# Altium PCB PCB1.PcbDoc (part 2 of 2)
Units mil, origin at the board's own origin, x right, y up, seen from the top; angles counter-clockwise.
Board outline 6000 x 4000 mil, 2 copper layers (Top Layer, Bottom Layer); 224 components, 172 nets, 745 pads, 57 vias.
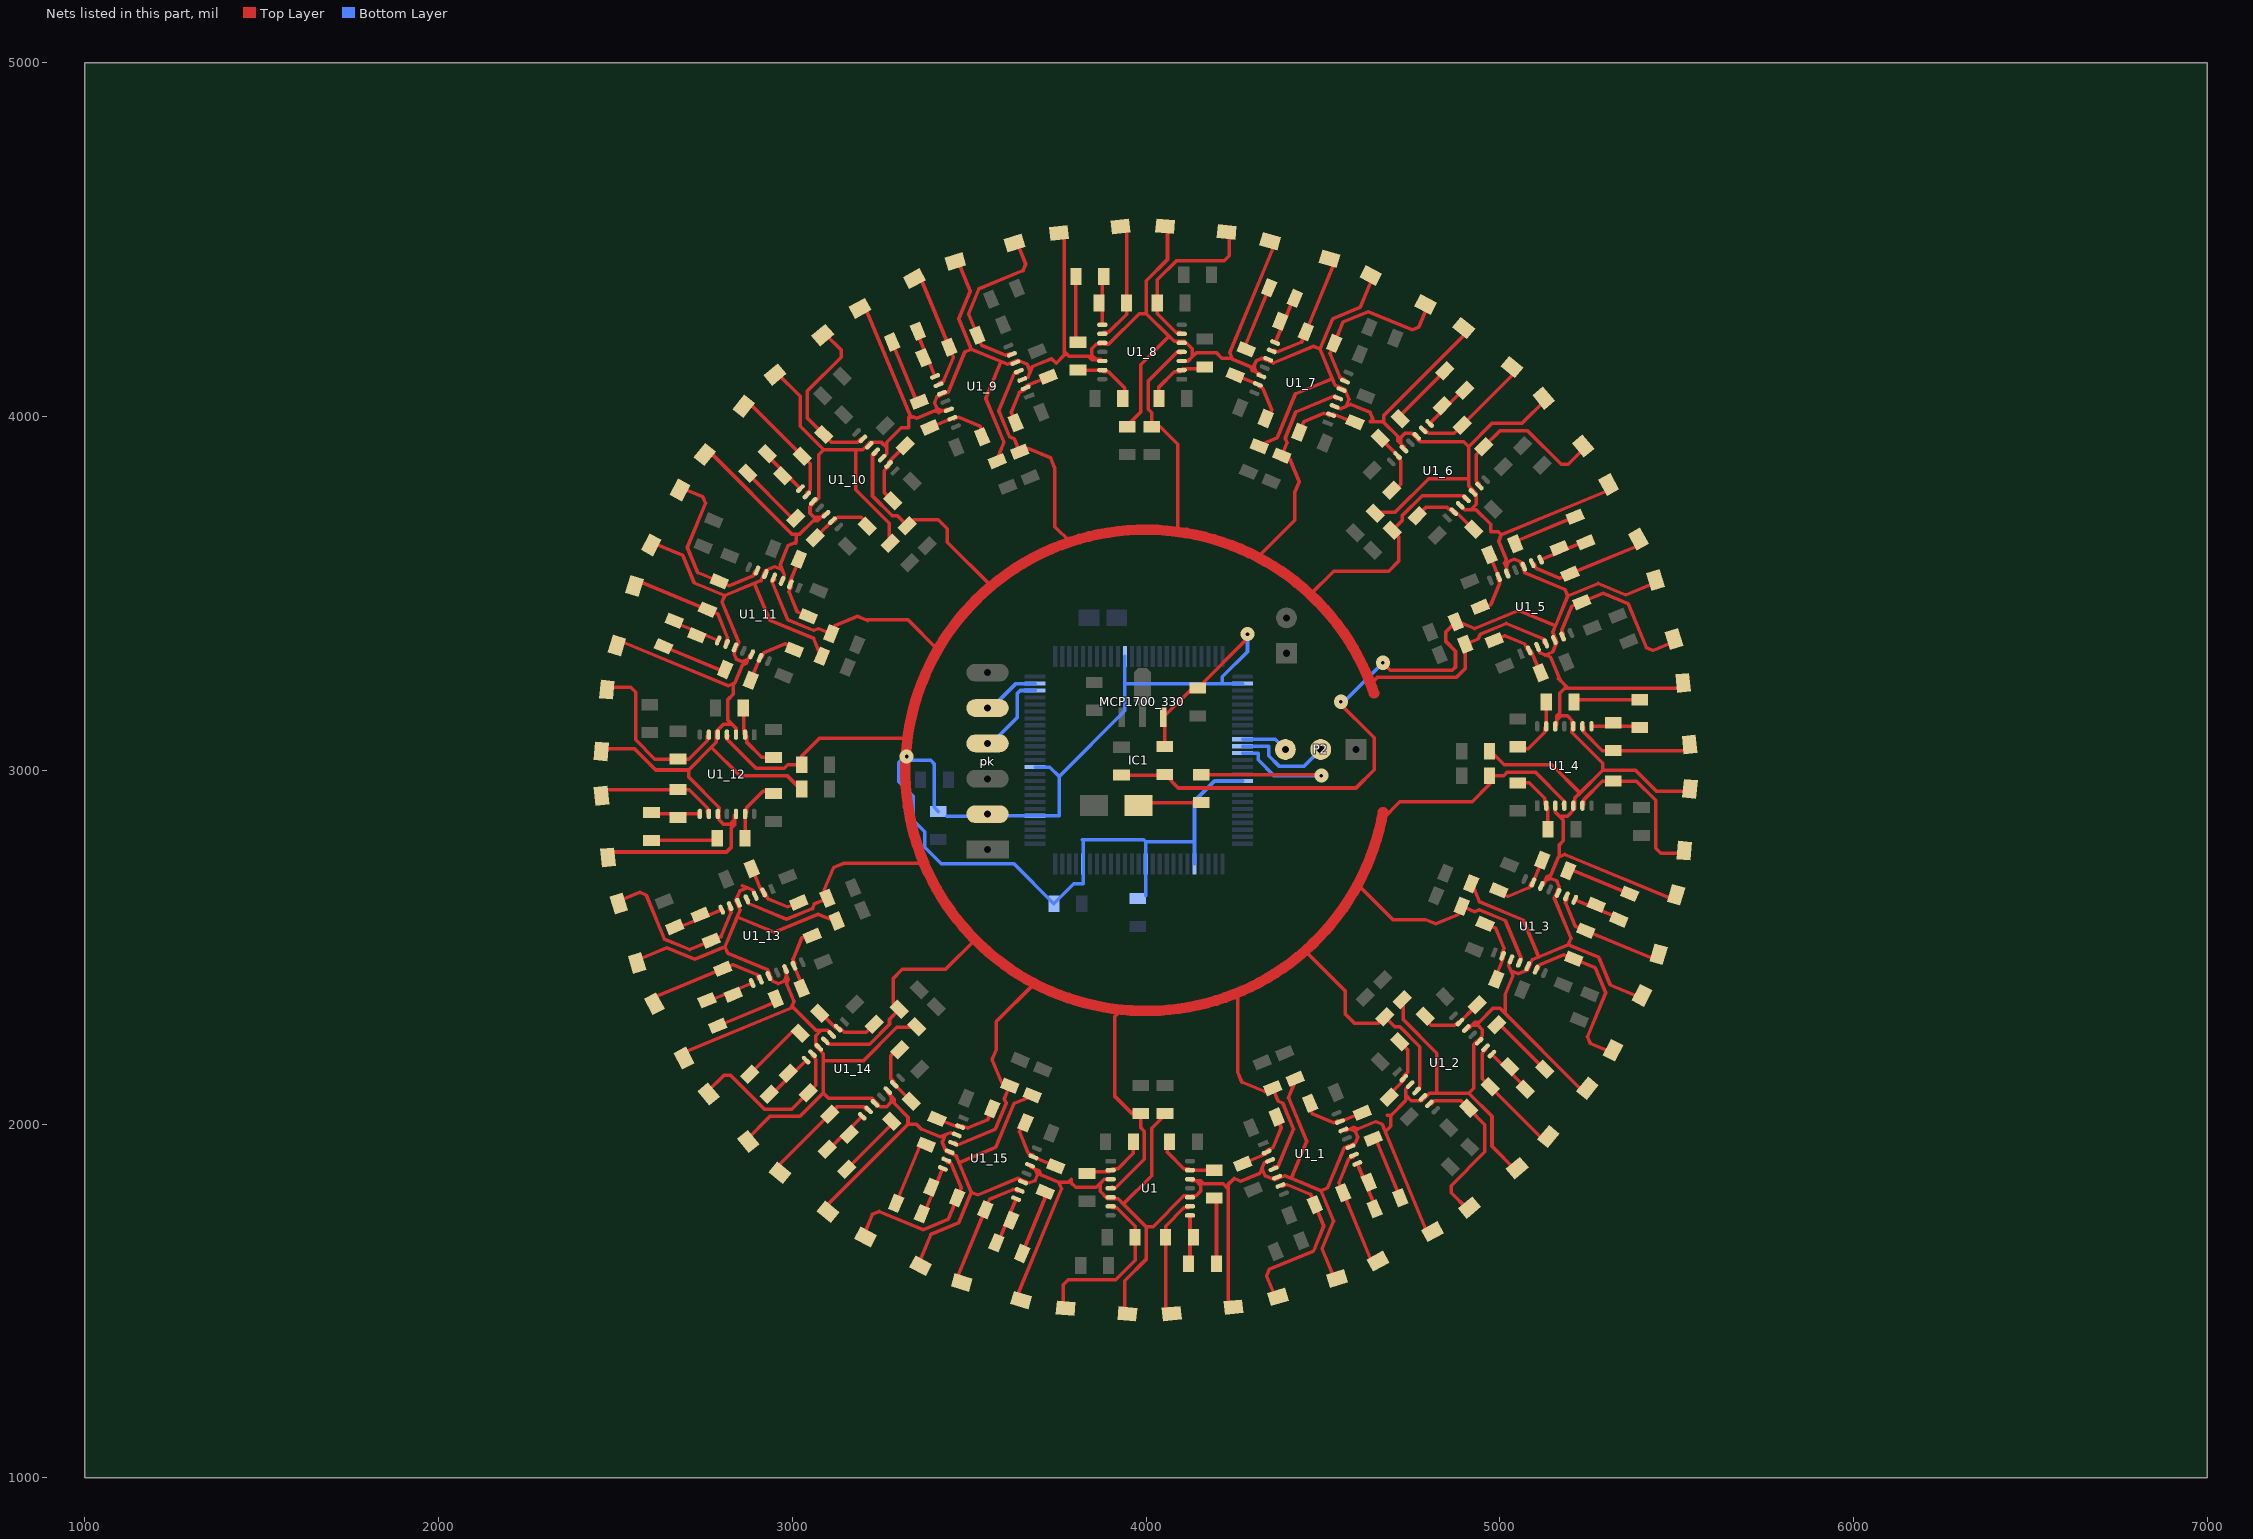
[diagram p2: the nets of this part, all layers, seen from the top]

## Via types
v1: diameter 40, hole 10, Top Layer to Bottom Layer, 57 vias

## Nets (pads, with @x,y where several pads share a name; then routed paths per layer and width w, separated by ;. In a path a pad name is that pad's centre, name@x,y a point inside that pad or via, vN(x,y) a via of type N, cw(c..) or ccw(c..) an arc to the next point about the centre after c; other vN are vias at no path point) (continued)
NetC_2_13_2: C_2_13.2 R_1_13.2 U1_13.7 | length 143.8
  Top Layer w10: C_2_13.2@2667.68,2557.01 2675.04,2553.96 U1_13.7@2800.52,2605.94
NetC_2_14_1: C_2_14.1 R_3_14.1 | length 189.5
  Top Layer w10: C_2_14.1@2879.3,2140.31 3003.93,2264.94 R_3_14.1@3017.18,2264.94
NetC_2_14_2: C_2_14.2 R_1_14.2 U1_14.7 | length 143.8
  Top Layer w10: C_2_14.2@2934.97,2084.63 2942.94,2084.63 U1_14.7@3038.98,2180.68
NetC_2_15_1: C_2_15.1 R_3_15.1 | length 189.5
  Top Layer w10: C_2_15.1@3293.44,1776.12 3360.9,1938.96 R_3_15.1@3373.14,1944.03
NetC_2_15_2: C_2_15.2 R_1_15.2 U1_15.7 | length 143.8
  Top Layer w10: C_2_15.2@3366.19,1745.98 3373.55,1749.03 U1_15.7@3425.53,1874.52
NetC_4_1: C_4.1 R_6.1 | length 191.6
  Top Layer w10: R_6.1@4185,1790.63 4199.37,1776.26 C_4.1@4199.37,1605
NetC_4_1_1: C_4_1.1 R_6_1.1 | length 191.6
  Top Layer w10: R_6_1.1@4634.55,1957.02 4653.32,1949.24 C_4_1.1@4718.86,1791.02
NetC_4_1_2: C_4_1.2 R_4_1.2 U1_1.8 | length 138
  Top Layer w10: U1_1.8@4597.38,1888.4 4648.16,1765.82 C_4_1.2@4646.11,1760.89
NetC_4_2: C_4.2 R_4.2 U1.8 | length 138
  Top Layer w10: C_4.2@4120.63,1605 4124.41,1608.78 U1.8@4124.41,1741.46
NetC_4_2_1: C_4_2.1 R_6_2.1 | length 191.6
  Top Layer w10: R_6_2.1@4986.08,2275.28 5006.4,2275.28 C_4_2.1@5127.5,2154.18
NetC_4_2_2: C_4_2.2 R_4_2.2 U1_2.8 | length 138
  Top Layer w10: U1_2.8@4978.01,2197.66 5071.82,2103.84 C_4_2.2@5071.82,2098.5
NetC_4_3_1: C_4_3.1 R_6_3.1 | length 191.6
  Top Layer w10: R_6_3.1@5190.12,2708.65 5208.89,2716.43 C_4_3.1@5367.11,2650.89
NetC_4_3_2: C_4_3.2 R_4_3.2 U1_3.8 | length 138
  Top Layer w10: U1_3.8@5212.36,2633.85 5334.94,2583.08 C_4_3.2@5336.98,2578.14
NetC_4_4_1: C_4_4.1 R_6_4.1 | length 191.6
  Top Layer w10: R_6_4.1@5210.37,3185 5224.74,3199.37 C_4_4.1@5396,3199.37
NetC_4_4_2: C_4_4.2 R_4_4.2 U1_4.8 | length 138
  Top Layer w10: U1_4.8@5259.54,3124.41 5392.22,3124.41 C_4_4.2@5396,3120.63
NetC_4_5_1: C_4_5.1 R_6_5.1 | length 191.6
  Top Layer w10: R_6_5.1@5046.98,3632.55 5054.76,3651.32 C_4_5.1@5212.98,3716.86
NetC_4_5_2: C_4_5.2 R_4_5.2 U1_5.8 | length 138
  Top Layer w10: U1_5.8@5115.6,3595.38 5238.18,3646.16 C_4_5.2@5243.11,3644.11
NetC_4_6_1: C_4_6.1 R_6_6.1 | length 191.6
  Top Layer w10: R_6_6.1@4724.22,3988.52 4724.22,4008.84 C_4_6.1@4845.32,4129.94
NetC_4_6_2: C_4_6.2 R_4_6.2 U1_6.8 | length 138
  Top Layer w10: U1_6.8@4801.83,3980.45 4895.65,4074.27 C_4_6.2@4900.99,4074.27
NetC_4_7_1: C_4_7.1 R_6_7.1 | length 191.6
  Top Layer w10: R_6_7.1@4290.35,4187.12 4282.57,4205.89 C_4_7.1@4348.11,4364.11
NetC_4_7_2: C_4_7.2 R_4_7.2 U1_7.8 | length 138
  Top Layer w10: U1_7.8@4365.15,4209.36 4415.92,4331.94 C_4_7.2@4420.86,4333.98
NetC_4_8_1: C_4_8.1 R_6_8.1 | length 191.6
  Top Layer w10: C_4_8.1@3801.63,4396 3801.63,4224.74 R_6_8.1@3816,4210.37
NetC_4_8_2: C_4_8.2 R_4_8.2 U1_8.8 | length 138
  Top Layer w10: U1_8.8@3876.59,4259.54 3876.59,4392.22 C_4_8.2@3880.37,4396
NetC_4_9_1: C_4_9.1 R_6_9.1 | length 191.6
  Top Layer w10: C_4_9.1@3282.14,4210.98 3347.68,4052.76 R_6_9.1@3366.45,4044.98
NetC_4_9_2: C_4_9.2 R_4_9.2 U1_9.8 | length 138
  Top Layer w10: C_4_9.2@3354.89,4241.11 3352.84,4236.18 U1_9.8@3403.62,4113.6
NetC_4_10_1: C_4_10.1 R_6_10.1 | length 191.6
  Top Layer w10: C_4_10.1@2873.5,3839.82 2994.6,3718.72 R_6_10.1@3014.92,3718.72
NetC_4_10_2: C_4_10.2 R_4_10.2 U1_10.8 | length 138
  Top Layer w10: C_4_10.2@2929.18,3895.5 2929.18,3890.16 U1_10.8@3022.99,3796.34
NetC_4_11_1: C_4_11.1 R_6_11.1 | length 191.6
  Top Layer w10: C_4_11.1@2635.89,3350.11 2794.11,3284.57 R_6_11.1@2812.88,3292.35
NetC_4_11_2: C_4_11.2 R_4_11.2 U1_11.8 | length 138
  Top Layer w10: C_4_11.2@2666.02,3422.86 2668.06,3417.92 U1_11.8@2790.64,3367.15
NetC_4_12_1: C_4_12.1 R_6_12.1 | length 191.6
  Top Layer w10: C_4_12.1@2602,2801.63 2773.26,2801.63 R_6_12.1@2787.63,2816
NetC_4_12_2: C_4_12.2 R_4_12.2 U1_12.8 | length 138
  Top Layer w10: C_4_12.2@2602,2880.37 2605.78,2876.59 U1_12.8@2738.46,2876.59
NetC_4_13_1: C_4_13.1 R_6_13.1 | length 191.6
  Top Layer w10: C_4_13.1@2789.02,2277.14 2947.24,2342.68 R_6_13.1@2955.02,2361.45
NetC_4_13_2: C_4_13.2 R_4_13.2 U1_13.8 | length 138
  Top Layer w10: C_4_13.2@2758.89,2349.89 2763.82,2347.84 U1_13.8@2886.4,2398.62
NetC_4_14_1: C_4_14.1 R_6_14.1 | length 191.6
  Top Layer w10: C_4_14.1@3154.18,1872.5 3275.28,1993.6 R_6_14.1@3275.28,2013.92
NetC_4_14_2: C_4_14.2 R_4_14.2 U1_14.8 | length 138
  Top Layer w10: C_4_14.2@3098.5,1928.18 3103.84,1928.18 U1_14.8@3197.66,2021.99
NetC_4_15_1: C_4_15.1 R_6_15.1 | length 191.6
  Top Layer w10: C_4_15.1@3649.89,1633.89 3715.43,1792.11 R_6_15.1@3707.65,1810.88
NetC_4_15_2: C_4_15.2 R_4_15.2 U1_15.8 | length 138
  Top Layer w10: C_4_15.2@3577.14,1664.02 3582.08,1666.06 U1_15.8@3632.85,1788.64
NetD1_1_2: D1_1.2 R_1_1.1 U1_1.6 | length 486.4
  Top Layer w10: D1_1.2@4365.98,1509.98 4340.95,1570.41 4348.63,1588.96 4473.31,1640.6 4502.76,1711.7 R_1_1.1@4477.67,1772.29 4465.93,1800.63 4397.88,1828.82 4385.87,1823.84 U1_1.6@4380.26,1826.17
NetD1_2: D1.2 R_1.1 U1.6 | length 486.4
  Top Layer w10: D1.2@3765.8,1480.4 3765.8,1545.8 3780,1560 3914.95,1560 3969.37,1614.42 R_1.1@3969.37,1680 3969.37,1710.67 3917.29,1762.76 3904.29,1762.76 U1.6@3900,1767.05
NetD1_2_2: D1_2.2 R_1_2.1 U1_2.6 | length 486.4
  Top Layer w10: U1_2.6@4801.23,2057.08 4807.3,2057.07 4816.49,2066.26 4890.14,2066.26 R_1_2.1@4911.83,2044.58 4958.21,1998.2 4958.21,1921.24 4862.78,1825.82 4862.78,1805.74 D1_2.2@4909.03,1759.49
NetD1_3_2: D1_3.2 R_1_3.1 U1_3.6 | length 486.4
  Top Layer w10: U1_3.6@5102.84,2436.32 5108.45,2438.64 5113.42,2450.65 5181.47,2478.83 R_1_3.1@5209.81,2467.1 5270.4,2442 5299.85,2370.9 5248.2,2246.22 5255.89,2227.67 D1_3.2@5316.32,2202.64
NetD1_4_2: D1_4.2 R_1_4.1 U1_4.6 | length 486.4
  Top Layer w10: U1_4.6@5233.95,2900 5238.24,2904.29 5238.24,2917.29 5290.33,2969.37 R_1_4.1@5321,2969.37 5386.58,2969.37 5441,2914.95 5441,2780 5455.2,2765.81 D1_4.2@5520.6,2765.8
NetD1_5_2: D1_5.2 R_1_5.1 U1_5.6 | length 486.4
  Top Layer w10: U1_5.6@5177.83,3378.26 5180.16,3383.87 5175.18,3395.88 5203.37,3463.93 R_1_5.1@5231.71,3475.67 5292.3,3500.76 5363.4,3471.31 5415.04,3346.63 5433.59,3338.95 D1_5.2@5494.02,3363.98
NetD1_6_2: D1_6.2 R_1_6.1 U1_6.6 | length 486.4
  Top Layer w10: U1_6.6@4942.42,3803.67 4942.42,3809.74 4933.23,3818.93 4933.23,3892.59 R_1_6.1@4954.92,3914.28 5001.29,3960.65 5078.25,3960.65 5173.68,3865.22 5193.75,3865.22 D1_6.2@5240,3911.47
NetD1_7_2: D1_7.2 R_1_7.1 U1_7.6 | length 486.4
  Top Layer w10: U1_7.6@4562.68,4099.84 4560.36,4105.45 4548.35,4110.42 4520.17,4178.47 R_1_7.1@4531.9,4206.81 4557,4267.4 4628.1,4296.85 4752.78,4245.2 4771.33,4252.89 D1_7.2@4796.36,4313.32
NetD1_8_2: D1_8.2 R_1_8.1 U1_8.6 | length 486.4
  Top Layer w10: U1_8.6@4101,4233.95 4096.71,4238.24 4083.71,4238.24 4031.63,4290.33 R_1_8.1@4031.63,4321 4031.63,4386.58 4086.05,4441 4221,4441 4235.2,4455.2 D1_8.2@4235.2,4520.6
NetD1_9_2: D1_9.2 R_1_9.1 U1_9.6 | length 486.4
  Top Layer w10: U1_9.6@3620.74,4175.83 3615.13,4178.16 3603.12,4173.18 3535.07,4201.37 R_1_9.1@3523.33,4229.71 3498.24,4290.3 3527.69,4361.4 3652.37,4413.04 3660.05,4431.59 D1_9.2@3635.02,4492.02
NetD1_10_2: D1_10.2 R_1_10.1 U1_10.6 | length 486.4
  Top Layer w10: D1_10.2@3091.97,4234.51 3138.22,4188.26 3138.22,4168.18 3042.79,4072.76 3042.79,3995.8 R_1_10.1@3089.17,3949.42 3110.86,3927.74 3184.51,3927.74 3193.7,3936.93 U1_10.6@3199.77,3936.93
NetD1_11_2: D1_11.2 R_1_11.1 U1_11.6 | length 486.4
  Top Layer w10: D1_11.2@2686.68,3798.36 2747.11,3773.33 2754.8,3754.78 2703.15,3630.1 2732.6,3559 R_1_11.1@2793.19,3533.9 2821.53,3522.17 2889.58,3550.35 2894.55,3562.36 U1_11.6@2900.16,3564.68
NetD1_12_2: D1_12.2 R_1_12.1 U1_12.6 | length 486.4
  Top Layer w10: D1_12.2@2477.4,3235.2 2542.8,3235.2 2557,3221 2557,3086.05 2611.42,3031.63 R_1_12.1@2677,3031.63 2707.67,3031.63 2759.76,3083.71 2759.76,3096.71 U1_12.6@2764.05,3101
NetD1_13_2: D1_13.2 R_1_13.1 U1_13.6 | length 486.4
  Top Layer w10: D1_13.2@2507.98,2630.02 2568.41,2655.05 2586.96,2647.37 2638.6,2522.69 2709.7,2493.24 R_1_13.1@2770.29,2518.33 2798.63,2530.07 2826.82,2598.12 2821.84,2610.13 U1_13.6@2824.17,2615.74
NetD1_14_2: D1_14.2 R_1_14.1 U1_14.6 | length 486.4
  Top Layer w10: D1_14.2@2759.49,2090.97 2805.74,2137.22 2825.82,2137.22 2921.24,2041.79 2998.2,2041.79 R_1_14.1@3044.58,2088.17 3066.26,2109.86 3066.26,2183.51 3057.07,2192.7 U1_14.6@3057.08,2198.77
NetD1_15_2: D1_15.2 R_1_15.1 U1_15.6 | length 486.4
  Top Layer w10: D1_15.2@3201.64,1684.68 3226.67,1745.11 3245.22,1752.8 3369.9,1701.15 3441,1730.6 R_1_15.1@3466.1,1791.19 3477.83,1819.53 3449.65,1887.58 3437.64,1892.55 U1_15.6@3435.32,1898.16
NetD2_1_2: D2_1.2 R_4_1.1 U1_1.9 | length 346.5
  Top Layer w10: U1_1.9@4587.59,1912.04 4585.27,1906.44 4573.26,1901.46 4545.4,1834.19 R_4_1.1@4557.36,1805.3 4633.48,1621.54 D2_1.2@4656.02,1612.2
NetD2_2: D2.2 R_4.1 U1.9 | length 346.5
  Top Layer w10: D2.2@4072.88,1463.84 4055.63,1481.1 R_4.1@4055.63,1680 4055.63,1711.26 4107.12,1762.76 4120.12,1762.76 U1.9@4124.41,1767.05
NetD2_2_2: D2_2.2 R_4_2.1 U1_2.9 | length 346.5
  Top Layer w10: U1_2.9@4959.91,2215.76 4959.91,2209.69 4950.72,2200.5 4950.72,2127.68 R_4_2.1@4972.83,2105.57 5113.48,1964.92 D2_2.2@5137.87,1964.92
NetD2_3_2: D2_3.2 R_4_3.1 U1_3.9 | length 346.5
  Top Layer w10: U1_3.9@5188.72,2643.65 5191.04,2638.04 5186.07,2626.03 5213.93,2558.75 R_4_3.1@5242.82,2546.79 5426.58,2470.67 D2_3.2@5449.12,2480.01
NetD2_4_2: D2_4.2 R_4_4.1 U1_4.9 | length 346.5
  Top Layer w10: U1_4.9@5233.95,3124.41 5238.24,3120.12 5238.24,3107.12 5289.74,3055.63 R_4_4.1@5321,3055.63 5519.91,3055.63 D2_4.2@5537.16,3072.88
NetD2_5_2: D2_5.2 R_4_5.1 U1_5.9 | length 346.5
  Top Layer w10: U1_5.9@5091.96,3585.59 5097.56,3583.27 5102.54,3571.26 5169.81,3543.4 R_4_5.1@5198.7,3555.36 5382.46,3631.48 D2_5.2@5391.8,3654.02
NetD2_6_2: D2_6.2 R_4_6.1 U1_6.9 | length 346.5
  Top Layer w10: U1_6.9@4783.74,3962.35 4789.81,3962.35 4798.99,3953.16 4871.82,3953.16 R_4_6.1@4893.92,3975.27 5034.57,4115.92 D2_6.2@5034.57,4140.31
NetD2_7_2: D2_7.2 R_4_7.1 U1_7.9 | length 346.4
  Top Layer w10: U1_7.9@4355.35,4185.72 4360.96,4188.04 4372.97,4183.07 4440.25,4210.93 R_4_7.1@4452.21,4239.82 4528.33,4423.58 D2_7.2@4518.99,4446.12
NetD2_8_2: D2_8.2 R_4_8.1 U1_8.9 | length 346.5
  Top Layer w10: U1_8.9@3876.59,4233.95 3880.88,4238.24 3893.88,4238.24 3945.37,4289.74 R_4_8.1@3945.37,4321 3945.37,4519.91 D2_8.2@3928.12,4537.16
NetD2_9_2: D2_9.2 R_4_9.1 U1_9.9 | length 346.5
  Top Layer w10: D2_9.2@3344.98,4389.8 3367.52,4380.46 R_4_9.1@3443.64,4196.7 3455.6,4167.81 3427.74,4100.54 3415.73,4095.56 U1_9.9@3413.41,4089.96
NetD2_10_2: D2_10.2 R_4_10.1 U1_10.9 | length 346.4
  Top Layer w10: D2_10.2@2863.13,4029.08 2887.52,4029.08 R_4_10.1@3028.17,3888.43 3050.28,3866.32 3050.28,3793.5 3041.09,3784.31 U1_10.9@3041.09,3778.24
NetD2_11_2: D2_11.2 R_4_11.1 U1_11.9 | length 346.5
  Top Layer w10: D2_11.2@2553.88,3520.99 2576.42,3530.33 R_4_11.1@2760.18,3454.21 2789.07,3442.25 2816.93,3374.97 2811.96,3362.96 U1_11.9@2814.28,3357.35
NetD2_12_2: D2_12.2 R_4_12.1 U1_12.9 | length 346.5
  Top Layer w10: D2_12.2@2460.84,2928.12 2478.1,2945.37 R_4_12.1@2677,2945.37 2708.26,2945.37 2759.76,2893.88 2759.76,2880.88 U1_12.9@2764.05,2876.59
NetD2_13_2: D2_13.2 R_4_13.1 U1_13.9 | length 346.5
  Top Layer w10: D2_13.2@2610.2,2339.98 2619.54,2362.52 R_4_13.1@2803.3,2438.64 2832.19,2450.6 2899.46,2422.74 2904.44,2410.73 U1_13.9@2910.04,2408.41
NetD2_14_2: D2_14.2 R_4_14.1 U1_14.9 | length 346.4
  Top Layer w10: D2_14.2@2964.92,1862.13 2964.92,1886.52 R_4_14.1@3105.57,2027.17 3127.68,2049.28 3200.5,2049.28 3209.69,2040.09 U1_14.9@3215.76,2040.09
NetD2_15_2: D2_15.2 R_4_15.1 U1_15.9 | length 346.5
  Top Layer w10: D2_15.2@3479.01,1551.88 3469.67,1574.42 R_4_15.1@3545.79,1758.18 3557.75,1787.07 3625.03,1814.93 3637.04,1809.96 U1_15.9@3642.65,1812.28
NetDebug_1: Debug.1 Rled.2 | length 180.2
  Top Layer w10: Debug.1@3978.99,2901 3986.62,2908.63 Rled.2@4156,2908.63
NetIC1_10: IC1.10 P2.3 | length 132.9
  Bottom Layer w10: IC1.10@4273,3087.84 4365.16,3087.84 P2.3@4394,3059
NetIC1_11: IC1.11 P2.2 | length 279.6
  Bottom Layer w10: IC1.11@4273,3068.15 4347,3068.15 4347,3041 4376,3012 4447,3012 P2.2@4494,3059
NetIC1_12: IC1.12 Rled.1 | length 591.8
  Top Layer w10: Rled.1@4156,2987.37 4493.63,2987.37 v1(4496,2985)
  Bottom Layer w10: IC1.12@4273,3048.47 4317.53,3048.47 4317.53,3029.47 4363,2984 v1@4486,2984
NetIC1_73: IC1.73 pk.4 | length 225.2
  Bottom Layer w10: pk.4@3563,3076 3636.63,3149.63 3636.63,3217.63 3644.63,3225.63 IC1.73@3686.39,3225.63
NetIC1_74: IC1.74 pk.5 | length 152.1
  Bottom Layer w10: pk.5@3563,3176 3632.32,3245.32 IC1.74@3686.39,3245.32
NetR_2_1: R_2.1 R_3.2 U1.2 | length 194.1
  Top Layer w10: R_3.2@3825,1864.37 3825.75,1865.12 3895.71,1865.12 U1.2@3900,1869.41 3904.29,1873.7 3920.98,1873.7 3964.37,1917.09 R_2.1@3964.37,1950
NetR_2_1_1: R_2_1.1 R_3_1.2 U1_1.2 | length 194.1
  Top Layer w10: R_3_1.2@4273.73,1887.38 4274.13,1888.36 4338.77,1915.13 U1_1.2@4341.09,1920.74 4343.41,1926.34 4358.83,1932.73 4382.31,1989.42 R_2_1.1@4369.72,2019.83
NetR_2_2_1: R_2_2.1 R_3_2.2 U1_2.2 | length 194.1
  Top Layer w10: R_3_2.2@4679.38,2072.86 4679.38,2073.92 4728.85,2123.39 U1_2.2@4728.85,2129.46 4728.85,2135.52 4740.65,2147.32 4740.65,2208.69 R_2_2.1@4717.38,2231.96
NetR_2_3_1: R_2_3.1 R_3_3.2 U1_3.2 | length 194.1
  Top Layer w10: R_2_3.1@4958.45,2565.8 4988.85,2553.21 5012.33,2496.51 5005.95,2481.1 U1_3.2@5008.27,2475.49 5010.59,2469.88 4983.82,2405.25 R_3_3.2@4984.22,2404.27
NetR_2_4_1: R_2_4.1 R_3_4.2 U1_4.2 | length 194.1
  Top Layer w10: R_2_4.1@5051,2964.37 5083.91,2964.37 5127.3,2920.98 5127.3,2904.29 U1_4.2@5131.59,2900 5135.88,2895.71 5135.88,2825.75 R_3_4.2@5136.63,2825
NetR_2_5_1: R_2_5.1 R_3_5.2 U1_5.2 | length 194.1
  Top Layer w10: R_2_5.1@4984.17,3367.72 5014.58,3380.31 5071.27,3356.83 5077.66,3341.41 U1_5.2@5083.26,3339.09 5088.87,3336.77 5115.64,3272.13 R_3_5.2@5116.62,3271.73
NetR_2_6_1: R_2_6.1 R_3_6.2 U1_6.2 | length 194.1
  Top Layer w10: R_2_6.1@4767.53,3719.82 4790.8,3743.09 4852.17,3743.09 4863.97,3731.29 U1_6.2@4870.04,3731.29 4876.11,3731.29 4925.58,3681.82 R_3_6.2@4926.63,3681.82
NetR_2_7_1: R_2_7.1 R_3_7.2 U1_7.2 | length 194.1
  Top Layer w10: R_2_7.1@4433.2,3955.45 4445.79,3985.85 4502.49,4009.33 4517.9,4002.95 U1_7.2@4523.51,4005.27 4529.12,4007.59 4593.75,3980.82 R_3_7.2@4594.73,3981.22
NetR_2_8_1: R_2_8.1 R_3_8.2 U1_8.2 | length 194.1
  Top Layer w10: R_2_8.1@4036.63,4051 4036.63,4083.91 4080.02,4127.3 4096.71,4127.3 U1_8.2@4101,4131.59 4105.29,4135.88 4175.25,4135.88 R_3_8.2@4176,4136.63
NetR_2_9_1: R_2_9.1 R_3_9.2 U1_9.2 | length 194.1
  Top Layer w10: R_2_9.1@3631.28,3982.17 3618.69,4012.58 3642.17,4069.27 3657.59,4075.66 U1_9.2@3659.91,4081.26 3662.23,4086.87 3726.87,4113.64 R_3_9.2@3727.27,4114.62
NetR_2_10_1: R_2_10.1 R_3_10.2 U1_10.2 | length 194.1
  Top Layer w10: R_2_10.1@3283.62,3762.04 3260.35,3785.31 3260.35,3846.68 3272.15,3858.48 U1_10.2@3272.15,3864.54 3272.15,3870.61 3321.62,3920.08 R_3_10.2@3321.62,3921.14
NetR_2_11_1: R_2_11.1 R_3_11.2 U1_11.2 | length 194.1
  Top Layer w10: R_3_11.2@3018.78,3596.73 3019.18,3595.75 2992.41,3531.12 U1_11.2@2994.73,3525.51 2997.05,3519.9 2990.67,3504.49 3014.15,3447.79 R_2_11.1@3044.55,3435.2
NetR_2_12_1: R_2_12.1 R_3_12.2 U1_12.2 | length 194.1
  Top Layer w10: R_3_12.2@2861.37,3176 2862.12,3175.25 2862.12,3105.29 U1_12.2@2866.41,3101 2870.7,3096.71 2870.7,3080.02 2914.09,3036.63 R_2_12.1@2947,3036.63
NetR_2_13_1: R_2_13.1 R_3_13.2 U1_13.2 | length 194.1
  Top Layer w10: R_3_13.2@2885.38,2722.27 2886.36,2721.87 2913.13,2657.23 U1_13.2@2918.74,2654.91 2924.34,2652.59 2930.73,2637.17 2987.43,2613.69 R_2_13.1@3017.83,2626.28
NetR_2_14_1: R_2_14.1 R_3_14.2 U1_14.2 | length 194.1
  Top Layer w10: R_3_14.2@3072.86,2320.62 3073.92,2320.62 3123.39,2271.15 U1_14.2@3129.46,2271.15 3135.52,2271.15 3147.32,2259.35 3208.69,2259.35 R_2_14.1@3231.96,2282.62
NetR_2_15_1: R_2_15.1 R_3_15.2 U1_15.2 | length 194.1
  Top Layer w10: R_3_15.2@3403.27,2016.78 3404.25,2017.18 3468.88,1990.41 U1_15.2@3474.49,1992.73 3480.1,1995.05 3495.51,1988.67 3552.21,2012.15 R_2_15.1@3564.8,2042.55
NetR_5_1: R_5.1 R_6.2 U1.13 | length 175.2
  Top Layer w10: R_5.1@4060.63,1950 4060.63,1920.19 4107.12,1873.7 4120.12,1873.7 U1.13@4124.41,1869.41 4184.96,1869.41 R_6.2@4185,1869.37
NetR_5_1_1: R_5_1.1 R_6_1.2 U1_1.13 | length 175.2
  Top Layer w10: R_5_1.1@4458.65,2056.66 4470.06,2029.13 4530.81,2003.96 4542.81,2008.94 U1_1.13@4548.42,2006.61 4604.36,2029.79 R_6_1.2@4604.41,2029.77
NetR_5_2_1: R_5_2.1 R_6_2.2 U1_2.13 | length 175.2
  Top Layer w10: R_5_2.1@4785.44,2300.02 4806.52,2278.95 4872.27,2278.95 4881.46,2288.14 U1_2.13@4887.53,2288.14 4930.35,2330.95 R_6_2.2@4930.4,2330.95
NetR_5_3_1: R_5_3.1 R_6_3.2 U1_3.13 | length 175.2
  Top Layer w10: R_5_3.1@4995.28,2654.73 5022.82,2643.33 5083.57,2668.49 5088.54,2680.5 U1_3.13@5094.15,2682.82 5117.32,2738.76 R_6_3.2@5117.37,2738.78
NetR_5_4_1: R_5_4.1 R_6_4.2 U1_4.13 | length 175.2
  Top Layer w10: R_5_4.1@5051,3060.63 5080.81,3060.63 5127.3,3107.12 5127.3,3120.12 U1_4.13@5131.59,3124.41 5131.59,3184.96 R_6_4.2@5131.63,3185
NetR_5_5_1: R_5_5.1 R_6_5.2 U1_5.13 | length 175.2
  Top Layer w10: R_5_5.1@4947.34,3456.65 4974.87,3468.06 5000.04,3528.81 4995.06,3540.81 U1_5.13@4997.39,3546.42 4974.21,3602.36 R_6_5.2@4974.23,3602.41
NetR_5_6_1: R_5_6.1 R_6_6.2 U1_6.13 | length 175.2
  Top Layer w10: R_6_6.2@4668.54,3932.84 4668.54,3932.79 U1_6.13@4711.36,3889.97 4711.36,3883.9 4720.54,3874.71 4720.54,3808.96 R_5_6.1@4699.47,3787.89
NetR_5_7_1: R_5_7.1 R_6_7.2 U1_7.13 | length 175.2
  Top Layer w10: R_6_7.2@4260.22,4114.37 4260.24,4114.32 U1_7.13@4316.18,4091.15 4318.5,4085.54 4330.51,4080.57 4355.67,4019.82 R_5_7.1@4344.27,3992.28
NetR_5_8_1: R_5_8.1 R_6_8.2 U1_8.13 | length 175.2
  Top Layer w10: R_6_8.2@3816,4131.63 3816.04,4131.59 U1_8.13@3876.59,4131.59 3880.88,4127.3 3893.88,4127.3 3940.37,4080.81 R_5_8.1@3940.37,4051
NetR_5_9_1: R_5_9.1 R_6_9.2 U1_9.13 | length 175.2
  Top Layer w10: R_6_9.2@3396.59,3972.23 3396.64,3972.21 U1_9.13@3452.58,3995.39 3458.19,3993.06 3470.19,3998.04 3530.94,3972.87 R_5_9.1@3542.35,3945.34
NetR_5_10_1: R_5_10.1 R_6_10.2 U1_10.13 | length 175.2
  Top Layer w10: R_6_10.2@3070.6,3663.05 3070.65,3663.05 U1_10.13@3113.47,3705.86 3119.54,3705.86 3128.73,3715.05 3194.48,3715.05 R_5_10.1@3215.56,3693.98
NetR_5_11_1: R_5_11.1 R_6_11.2 U1_11.13 | length 175.2
  Top Layer w10: R_6_11.2@2885.63,3262.22 2885.68,3262.24 U1_11.13@2908.85,3318.18 2914.46,3320.5 2919.43,3332.51 2980.18,3357.67 R_5_11.1@3007.72,3346.27
NetR_5_12_1: R_5_12.1 R_6_12.2 U1_12.13 | length 175.2
  Top Layer w10: R_6_12.2@2866.37,2816 2866.41,2816.04 U1_12.13@2866.41,2876.59 2870.7,2880.88 2870.7,2893.88 2917.19,2940.37 R_5_12.1@2947,2940.37
NetR_5_13_1: R_5_13.1 R_6_13.2 U1_13.13 | length 175.2
  Top Layer w10: R_6_13.2@3027.77,2391.59 3027.79,2391.64 U1_13.13@3004.61,2447.58 3006.94,2453.19 3001.96,2465.19 3027.13,2525.94 R_5_13.1@3054.66,2537.35
NetR_5_14_1: R_5_14.1 R_6_14.2 U1_14.13 | length 175.2
  Top Layer w10: R_5_14.1@3300.02,2214.56 3278.95,2193.48 3278.95,2127.73 3288.14,2118.54 U1_14.13@3288.14,2112.47 3330.95,2069.65 R_6_14.2@3330.95,2069.6
NetR_5_15_1: R_5_15.1 R_6_15.2 U1_15.13 | length 175.2
  Top Layer w10: R_5_15.1@3653.73,2005.72 3642.33,1978.18 3667.49,1917.43 3679.5,1912.46 U1_15.13@3681.82,1906.85 3737.76,1883.68 R_6_15.2@3737.78,1883.63
VCC: C2.2 C5.2 C6.1 C_1.2 C_1_1.2 C_1_2.2 C_1_3.2 C_1_4.2 C_1_5.2 C_1_6.2 C_1_7.2 C_1_8.2 C_1_9.2 C_1_10.2 C_1_11.2 C_1_12.2 C_1_13.2 C_1_14.2 C_1_15.2 IC1.2 IC1.16 IC1.30 IC1.37 IC1.46 IC1.55 IC1.62 IC1.86 MCP1700_330.3 pk.2 R1.2 R2.2 U1.4 U1_1.4 U1_2.4 U1_3.4 U1_4.4 U1_5.4 U1_6.4 U1_7.4 U1_8.4 U1_9.4 U1_10.4 U1_11.4 U1_12.4 U1_13.4 U1_14.4 U1_15.4 | length 17768.7
  Top Layer w10: U1_12.4@2819.52,3096.71 U1_12.4@2815.23,3101 2815.23,3088 2897.35,3005.88 2976.84,3005.88 2986.95,3016 C_1_12.2@3026.63,3016 3026.63,3040.63 3076,3090 3319.6,3090 3326.54,3096.94 ; U1_13.4@2877.06,2633 U1_13.4@2871.45,2635.32 2876.42,2623.32 2983.72,2578.87 3057.16,2609.29 3062.63,2622.51 C_1_13.2@3099.29,2637.69 3089.86,2660.45 3116.58,2724.95 3146.15,2737.2 3371.06,2737.2 3373.37,2734.89 ; U1_11.4@2949.77,3539.49 U1_11.4@2947.45,3545.1 2942.47,3533.09 2986.92,3425.79 3060.35,3395.37 3073.57,3400.85 C_1_11.2@3110.23,3385.67 3119.65,3408.42 3184.16,3435.14 3208.64,3425 ; U1_14.4@3099.33,2234.96 U1_14.4@3093.27,2234.96 3102.45,2225.77 3218.59,2225.77 3274.8,2281.98 3274.8,2296.29 C_1_14.2@3302.85,2324.34 3285.44,2341.76 3285.44,2411.58 3308.06,2434.2 3311.09,2437.23 3433.26,2437.23 3516.9,2520.88 ; 3213.72,3422.89 3208.64,3425 ; U1_10.4@3235.96,3894.67 U1_10.4@3235.96,3900.73 3226.77,3891.55 3226.77,3775.41 3282.98,3719.2 3297.29,3719.2 C_1_10.2@3325.34,3691.15 3342.76,3708.56 3412.58,3708.56 3438.23,3682.91 3438.23,3645.08 3562.35,3520.97 ; 3411.39,3341.3 3327.68,3425 3208.64,3425 ; U1_15.4@3460.51,1947.77 U1_15.4@3454.9,1945.45 3466.91,1940.47 3574.21,1984.92 3604.63,2058.35 3599.15,2071.57 C_1_15.2@3614.33,2108.23 3591.58,2117.65 3564.86,2182.16 3577.11,2211.72 3577.11,2289.64 3684.59,2397.12 ; U1_9.4@3638,4122.94 U1_9.4@3640.32,4128.55 3628.32,4123.58 3583.87,4016.28 3614.29,3942.84 3627.51,3937.37 C_1_9.2@3642.69,3900.71 3665.45,3910.14 3729.95,3883.42 3742.2,3853.85 3742.2,3688.93 3785.44,3645.69 ; U1.4@3904.29,1822.52 U1.4@3900,1818.23 3913,1818.23 3995.12,1900.35 3995.12,1979.84 3985,1989.95 C_1.2@3985,2029.63 3960.37,2029.63 3911,2079 3911,2302.87 3931.21,2323.08 ; R2.2@4053,3067.37 4053,3153.89 4131.48,3232.37 C2.2@4146,3232.37 4287,3373.37 v1(4287,3385) ; 4086.82,3674.84 4090,3678.02 4090,3922 4040.63,3971.37 C_1_8.2@4016,3971.37 4016,4011.05 4005.88,4021.16 4005.88,4100.65 4088,4182.77 U1_8.4@4101,4182.77 U1_8.4@4096.71,4178.48 ; 4249.38,2366.95 4258.8,2357.53 4258.8,2148.15 4271.05,2118.58 4335.55,2091.86 C_1_1.2@4358.31,2101.29 4373.49,2064.63 4386.71,2059.16 4417.13,1985.72 4372.68,1878.42 U1_1.4@4360.68,1873.45 U1_1.4@4363,1879.06 ; 4316.16,3602.49 4420.89,3707.22 4420.89,3786.28 4433.14,3815.84 4406.42,3880.35 C_1_7.2@4383.67,3889.77 4398.85,3926.43 4393.37,3939.65 4423.79,4013.08 4531.09,4057.53 U1_7.4@4543.1,4052.55 U1_7.4@4537.49,4050.23 ; 4449.74,2489.43 4562.77,2376.4 4562.77,2311.09 4565.8,2308.06 4588.42,2285.44 4658.24,2285.44 C_1_2.2@4675.66,2302.85 4703.71,2274.8 4718.02,2274.8 4774.23,2218.59 4774.23,2102.45 U1_2.4@4765.04,2093.27 U1_2.4@4765.04,2099.33 ; 4464.82,3496.88 4531.08,3563.14 4686.33,3563.14 4714.06,3590.87 4714.06,3660.69 C_1_6.2@4696.64,3678.1 4724.7,3706.16 4724.7,3720.47 4780.9,3776.67 4897.04,3776.67 U1_6.4@4906.23,3767.48 U1_6.4@4900.16,3767.48 ; 4598.82,2676.95 4697.67,2578.11 4789.28,2578.11 4818.84,2565.86 4883.35,2592.58 C_1_3.2@4892.77,2615.33 4929.43,2600.15 4942.65,2605.63 5016.08,2575.21 5060.53,2467.91 U1_3.4@5055.55,2455.9 U1_3.4@5053.23,2461.51 ; 4635.21,3243.85 4654.36,3263 4878,3263 4902.71,3287.71 C_1_5.2@4902.71,3356.31 4939.37,3371.49 4944.84,3384.71 5018.28,3415.13 5125.58,3370.68 U1_5.4@5130.55,3358.68 U1_5.4@5124.94,3361 ; 4665.69,2859.28 4717.41,2911 4922,2911 4971.37,2960.37 C_1_4.2@4971.37,2985 5011.05,2985 5021.16,2995.12 5100.65,2995.12 5182.77,2913 U1_4.4@5182.77,2900 U1_4.4@5178.48,2904.29
  Top Layer w30: 4644.71,3217.48 ccw(c4000,3000) 4635.21,3243.85 ccw(c4000,3000) 4464.82,3496.88 ccw(c4000,3000) 4316.16,3602.49 ccw(c4000,3000) 4086.82,3674.84 ccw(c4000,3000) 3785.44,3645.69 ccw(c4000,3000) 3562.35,3520.97 ccw(c4000,3000) 3411.39,3341.3 ccw(c4000,3000) 3326.54,3096.94 ccw(c4000,3000) 3373.37,2734.89 ccw(c4000,3000) 3516.9,2520.88 ccw(c4000,3000) 3684.59,2397.12 ccw(c4000,3000) 3931.21,2323.08 ccw(c4000,3000) 4249.38,2366.95 ccw(c4000,3000) 4449.74,2489.43 ccw(c4000,3000) 4598.82,2676.95 ccw(c4000,3000) 4665.69,2859.28 ccw(c4000,3000) 4670.07,2881.85
  Bottom Layer w10: R1.2@3413,2883.37 3401,2895.37 3401,3018 3391,3028 3307,3028 3301,3022 3301,2968 3342,2927 3342,2858.35 3374.38,2825.97 3374.38,2782.67 3421.05,2736 3626.63,2736 C5.2@3739.63,2623 3795.42,2678.79 3822.21,2678.79 IC1.46@3822.21,2735.47 3822.21,2801.79 3820,2804 3993,2804 3999.17,2797.83 ; 3437,2870.37 3557.37,2870.37 pk.2@3558.3,2871.3 ; pk.2@3563,2876 3567.7,2871.3 IC1.55@3686.39,2871.3 3754.7,2871.3 ; IC1.62@3686.39,3009.1 3727.9,3009.1 3754.7,2982.3 ; 3755,2871.6 3754.7,2871.3 ; IC1.86@3940.32,3322.09 3940.32,3246.68 ; C6.1@3999.38,2645.99 IC1.37@3999.38,2735.47 3999.38,2797.62 3999.17,2797.83 ; IC1.30@4137.17,2735.47 4137.17,2797.83 ; IC1.16@4273,2969.73 4193.73,2969.73 4137.17,2913.17 4137.17,2797.83 ; IC1.2@4273,3245.32 4216,3245.32 ; v1@4287,3378 4287,3335 4216,3264 4216,3245.32 ; 3754.7,2871.3 3754.7,2982.3 ; 3754.7,2982.3 3940.32,3167.92 3940.32,3246.68 ; 3940.32,3246.68 3941.68,3245.32 4216,3245.32 ; 3999.17,2797.83 4137.17,2797.83
  other v1: 3323,3039
VCC/2: C_3.2 C_3_1.2 C_3_2.2 C_3_3.2 C_3_4.2 C_3_5.2 C_3_6.2 C_3_7.2 C_3_8.2 C_3_9.2 C_3_10.2 C_3_11.2 C_3_12.2 C_3_13.2 C_3_14.2 C_3_15.2 D1.1 D1_1.1 D1_2.1 D1_3.1 D1_4.1 D1_5.1 D1_6.1 D1_7.1 D1_8.1 D1_9.1 D1_10.1 D1_11.1 D1_12.1 D1_13.1 D1_14.1 D1_15.1 D2.1 D2_1.1 D2_2.1 D2_3.1 D2_4.1 D2_5.1 D2_6.1 D2_7.1 D2_8.1 D2_9.1 D2_10.1 D2_11.1 D2_12.1 D2_13.1 D2_14.1 D2_15.1 R2.1 R3.2 U1.3 U1.5 U1.10 U1.12 U1_1.3 U1_1.5 U1_1.10 U1_1.12 U1_2.3 U1_2.5 U1_2.10 U1_2.12 U1_3.3 U1_3.5 U1_3.10 U1_3.12 U1_4.3 U1_4.5 U1_4.10 U1_4.12 U1_5.3 U1_5.5 U1_5.10 U1_5.12 U1_6.3 U1_6.5 U1_6.10 U1_6.12 U1_7.3 U1_7.5 U1_7.10 U1_7.12 U1_8.3 U1_8.5 U1_8.10 U1_8.12 U1_9.3 U1_9.5 U1_9.10 U1_9.12 U1_10.3 U1_10.5 U1_10.10 U1_10.12 U1_11.3 U1_11.5 U1_11.10 U1_11.12 U1_12.3 U1_12.5 U1_12.10 U1_12.12 U1_13.3 U1_13.5 U1_13.10 U1_13.12 U1_14.3 U1_14.5 U1_14.10 U1_14.12 U1_15.3 U1_15.5 U1_15.10 U1_15.12 | length 27462.9
  Top Layer w10: D1_12.1@2460.6,3060.8 2553.96,3060.8 2613.88,3000.88 2706.84,3000.88 ; D2_12.1@2479.16,2753.88 2494.28,2769 2814,2769 2828,2783 2828,2838.21 2836.53,2846.74 2836.53,2859.3 ; D2_11.1@2504.12,3353.01 2523.87,3361.19 2819.26,3238.84 2831.6,3243.95 2837.55,3246.41 2858.68,3297.42 2869.82,3302.04 2874.63,3313.65 ; D1_13.1@2559.2,2462.48 2645.45,2498.2 2723.74,2465.77 2809.62,2501.34 ; D1_11.1@2604.44,3643.67 2690.68,3607.94 2723.11,3529.65 2808.99,3494.08 ; D2_13.1@2693.8,2186.02 2701.98,2205.77 2997.37,2328.12 ; D2_10.1@2752.87,3892.92 2774.25,3892.92 3000.33,3666.84 3011,3666.84 ; 2832.62,3241.48 2832.62,3214.62 2818,3200 2818,3141.58 2828.81,3130.76 ; U1_12.12@2840.82,2876.59 2836.53,2872.3 2836.53,2859.3 ; U1_12.3@2842.12,3099.7 U1_12.3@2840.82,3101 2840.82,3118.76 2828.81,3130.76 ; 2858.48,2673.87 2872.61,2668.02 ; D1_14.1@2870.93,1955.78 2936.94,2021.79 3021.69,2021.79 3087.41,2087.52 ; U1_11.12@2885.21,3327.98 2879.6,3325.65 2874.63,3313.65 ; U1_13.3@2896.79,2644.41 U1_13.3@2895.09,2645.11 2888.3,2661.52 2872.61,2668.02 ; D1_10.1@2956.78,4123.07 3022.79,4057.06 3022.79,3972.31 3088.52,3906.59 ; U1_11.3@2971.79,3533.6 U1_11.3@2971.09,3535.3 2977.89,3551.71 2971.39,3567.39 ; U1_13.12@2980.97,2437.79 2978.65,2432.18 2983.62,2420.17 ; 3009,3642.58 3007,3643.41 2987.89,3635.5 2965.54,3581.52 2971.39,3567.39 ; 3011,3647.41 3011,3666.84 ; C_3_12.2@3026.63,2947 3023.24,2947 2985.12,2985.12 2850.93,2985.12 2771,3065.05 ; C_3_11.2@3083.82,3321.92 3080.69,3323.22 3060.06,3373.02 2936.08,3424.37 2892.83,3528.8 ; U1_10.12@3095.37,3723.96 3089.31,3723.96 3080.12,3714.77 ; D2_14.1@3101.08,1751.87 3101.08,1773.25 3327.16,1999.33 ; U1_14.3@3113.2,2253.06 U1_14.3@3111.36,2253.06 3098.8,2265.61 3081.83,2265.61 ; C_3_13.2@3125.69,2573.94 3122.56,2572.65 3072.76,2593.28 2948.78,2541.92 2844.35,2585.18 ; D2_9.1@3191.02,4306.2 3210.77,4298.02 3333.12,4002.63 3340.28,3999.67 3351.42,3995.06 3402.43,4016.18 3413.57,4011.57 3425.17,4016.38 ; U1_10.3@3254.06,3880.8 U1_10.3@3254.06,3882.64 3266.61,3895.2 3266.61,3912.17 ; U1_14.12@3270.04,2094.37 3270.04,2088.31 3279.23,2079.12 ; C_3_10.2@3276.55,3642.36 3274.15,3644.76 3274.15,3698.66 3179.26,3793.55 3179.26,3906.59 ; 3339.63,3998.11 3328.6,3998.11 3328.6,3968.78 3307.92,3968.78 3266.61,3927.47 3266.61,3912.17 ; C_3_14.2@3351.64,2275.55 3349.24,2273.15 3295.34,2273.15 3200.45,2178.26 3087.41,2178.26 ; D1_15.1@3356.33,1602.44 3392.06,1688.68 3470.35,1721.11 3505.92,1806.99 ; U1_9.12@3442.79,4019.03 3437.18,4021.35 3425.17,4016.38 ; U1_15.3@3466.4,1969.79 U1_15.3@3464.7,1969.09 3448.29,1975.89 3432.61,1969.39 ; D1_9.1@3467.48,4440.8 3503.2,4354.55 3470.77,4276.26 3506.34,4190.38 ; C_3_9.2@3578.94,3874.31 3577.65,3877.44 3598.28,3927.24 3546.92,4051.22 3590.18,4155.65 ; D2_15.1@3646.99,1502.12 3638.81,1521.87 3761.16,1817.26 3753.59,1835.55 ; U1_9.3@3649.41,4103.21 U1_9.3@3650.11,4104.91 3666.52,4111.7 3673.02,4127.39 ; U1_15.12@3672.02,1883.21 3674.35,1877.6 3686.35,1872.63 ; C_3_15.2@3678.08,2081.82 3676.78,2078.69 3626.98,2058.06 3575.63,1934.08 3471.2,1890.83 ; D2_8.1@3753.88,4518.84 3769,4503.72 3769,4184 ; U1_8.12@3876.59,4157.18 3872.3,4161.47 3859.3,4161.47 ; U1.3@3901.3,1845.12 U1.3@3900,1843.82 3882.24,1843.82 3870.24,1831.81 ; R3.2@3931,2986.63 4051,2986.63 R2.1@4053,2988.63 4091.63,2950 4593.72,2950 4645,3001.28 4645,3092 4543,3194 v1(4551,3194) ; D1.1@3940.2,1463.6 3940.2,1556.96 4000.12,1616.88 4000.12,1709.84 ; C_3_8.2@3947,3971.37 3947,3974.76 3985.12,4012.88 3985.12,4147.07 4065.05,4227 ; C_3.2@4054,2029.63 4054,2026.24 4015.88,1988.12 4015.88,1853.93 3935.95,1774 ; D1_8.1@4060.8,4537.4 4060.8,4444.04 4000.88,4384.12 4000.88,4291.16 ; U1_8.3@4099.7,4155.88 U1_8.3@4101,4157.18 4118.76,4157.18 4130.76,4169.19 ; U1.12@4124.41,1843.82 4128.7,1839.53 4141.7,1839.53 ; 4241.48,4165.38 4214.62,4165.38 4200,4180 4141.58,4180 4130.76,4169.19 ; D2.1@4247.12,1482.16 4232,1497.28 4232,1817 ; C_3_7.2@4319.92,3916.18 4321.22,3919.31 4371.02,3939.94 4422.37,4063.92 4526.8,4107.17 ; U1_7.12@4325.98,4114.79 4323.65,4120.4 4311.65,4125.37 ; D2_7.1@4351.01,4495.88 4359.19,4476.13 4236.84,4180.74 4242.95,4165.99 4244.41,4162.45 4295.42,4141.32 4300.04,4130.18 4311.65,4125.37 ; U1_1.3@4351.59,1898.79 U1_1.3@4350.89,1897.09 4334.48,1890.3 4327.98,1874.61 ; C_3_1.2@4422.06,2127.69 4423.35,2124.56 4402.72,2074.76 4454.08,1950.78 4410.82,1846.35 ; U1_7.3@4531.61,4028.21 U1_7.3@4533.3,4028.91 4549.71,4022.11 4565.39,4028.61 ; D1_1.1@4533.52,1561.2 4497.8,1647.45 4530.23,1725.74 4494.66,1811.62 ; U1_1.12@4558.21,1982.97 4563.82,1980.65 4575.83,1985.62 ; D1_7.1@4641.67,4395.57 4605.94,4309.32 4527.65,4276.89 4492.08,4191.01 ; C_3_6.2@4647.85,3726.89 4650.25,3729.29 4704.16,3729.29 4799.04,3824.18 4912.08,3824.18 ; v1(4670,3304) 4690.67,3283.33 4866.33,3283.33 4875,3292 4875,3337 4848,3364 4848,3391.75 C_3_5.2@4876.31,3420.06 4879.44,3421.35 4929.24,3400.72 5053.22,3452.08 5157.65,3408.82 ; 4670.65,3985 4633.41,3985 4641.41,3993 4633.5,4012.11 4579.52,4034.46 4565.39,4028.61 ; 4680.49,1982.13 4692.22,1993.85 4692.22,2024.36 4693.08,2025.22 ; 4682.78,2025.22 4693.08,2025.22 ; C_3_2.2@4724.45,2351.64 4726.85,2349.24 4726.85,2295.34 4821.74,2200.45 4821.74,2087.41 ; U1_6.12@4729.45,3908.07 4729.45,3914.14 4720.26,3923.33 ; U1_2.3@4746.94,2113.2 U1_2.3@4746.94,2111.36 4734.39,2098.8 4734.39,2081.83 ; D2_1.1@4809.98,1695.8 4790.23,1703.98 4675.82,1980.19 4667.88,1999.37 4649.58,2006.94 4598.57,1985.82 4587.43,1990.43 4575.83,1985.62 ; U1_6.3@4886.29,3749.39 U1_6.3@4888.13,3749.39 4900.69,3736.83 4917.67,3736.83 ; D2_6.1@4898.42,4250.57 4898.42,4229.19 4672.34,4003.11 4672.34,3983.31 4711.38,3944.27 4711.38,3932.21 4720.26,3923.33 ; U1_2.12@4905.63,2270.04 4911.69,2270.04 4920.88,2279.23 ; C_3_3.2@4919.18,2679.08 4922.31,2677.78 4942.94,2627.98 5066.92,2576.63 5110.17,2472.2 ; C_3_4.2@4971.37,3054 4974.76,3054 5012.88,3015.88 5147.07,3015.88 5227,2935.95 ; U1_5.12@5021.03,3556.21 5023.35,3561.82 5018.38,3573.83 ; U1_3.3@5031.21,2467.4 U1_3.3@5031.91,2465.7 5025.11,2449.29 5031.61,2433.61 ; D1_2.1@5044.22,1870.93 4978.21,1936.94 4978.21,2021.69 4912.48,2087.41 ; U1_5.3@5105.21,3349.59 U1_5.3@5106.91,3348.89 5113.7,3332.48 5129.39,3325.98 ; U1_3.12@5117.79,2673.02 5123.4,2675.35 5128.37,2687.35 ; D1_6.1@5128.56,4046.66 5062.55,3980.65 4977.81,3980.65 4912.08,3914.92 ; U1_4.3@5155.88,2901.3 U1_4.3@5157.18,2900 5157.18,2882.24 5169.19,2870.24 ; U1_4.12@5157.18,3124.41 5161.47,3128.7 5161.47,3141.7 ; 5165.87,3259.13 5170.84,3254.16 ; 5171.42,3252.76 5170.84,3254.16 ; D2_2.1@5248.13,2101.08 5226.75,2101.08 5015.11,2312.72 ; D2_5.1@5308.2,3807.98 5300.02,3788.23 5004.63,3665.88 ; D1_3.1@5398.57,2357.33 5312.32,2393.06 5279.89,2471.35 5194.01,2506.92 ; D1_5.1@5442.8,3531.52 5356.55,3495.8 5278.26,3528.23 5192.38,3492.66 ; D2_3.1@5498.88,2647.99 5479.13,2639.81 5183.74,2762.16 5165.45,2754.59 ; D2_4.1@5518.84,3247.12 5503.72,3232 5193,3232 ; D1_4.1@5537.4,2940.2 5444.04,2940.2 5384.12,3000.12 5291.16,3000.12 ; 2706.84,3000.88 2706.84,2980.97 2793.93,2893.88 2793.93,2880.88 U1_12.10@2789.64,2876.59 2793.93,2872.3 2793.93,2859.3 2806.41,2846.83 2824.05,2846.83 2836.53,2859.3 ; 2706.84,3000.88 2771,3065.05 ; 2771,3065.05 2785.35,3079.39 2785.35,3109.7 2806.41,3130.76 2828.81,3130.76 ; 2808.99,3494.08 2801.37,3475.68 2848.51,3361.89 2843.53,3349.88 U1_11.10@2837.93,3347.56 2840.25,3341.95 2835.28,3329.95 2842.03,3313.65 2858.33,3306.89 2874.63,3313.65 ; 2808.99,3494.08 2892.83,3528.8 ; 2809.62,2501.34 2817.24,2482.95 2931.04,2435.81 2936.01,2423.81 U1_13.10@2933.69,2418.2 2939.29,2415.88 2944.27,2403.87 2960.57,2397.12 2976.87,2403.87 2983.62,2420.17 ; 2809.62,2501.34 2844.35,2585.18 ; 2844.35,2585.18 2852.11,2603.92 2843.85,2623.89 2840.51,2631.93 2851.91,2659.44 2872.61,2668.02 ; 2892.83,3528.8 2911.57,3536.57 2919.84,3556.53 2923.17,3564.57 2950.69,3575.97 2971.39,3567.39 ; 2983.62,2420.17 2988.43,2408.57 2983.82,2397.43 3004.94,2346.42 2997.37,2328.12 ; 2997.37,2328.12 3004.02,2328.12 3066.53,2265.61 3081.83,2265.61 ; 3011,3666.84 3020.13,3666.84 3059.17,3705.89 3071.23,3705.89 3080.12,3714.77 ; 3080.12,3714.77 3062.47,3714.77 3050,3727.25 3050,3744.89 3059.18,3754.08 U1_10.10@3059.18,3760.15 3065.25,3760.15 3074.44,3769.34 3074.44,3892.51 3088.52,3906.59 ; 3081.83,2265.61 3065.98,2249.77 3065.98,2219.99 3087.41,2198.55 3087.41,2178.26 ; 3087.41,2087.52 3087.41,2178.26 ; 3087.41,2087.52 3101.49,2073.44 3224.66,2073.44 3233.85,2064.25 U1_14.10@3233.85,2058.18 3239.92,2058.18 3249.11,2049 3266.75,2049 3279.23,2061.47 3279.23,2079.12 ; 3088.52,3906.59 3179.26,3906.59 ; 3179.26,3906.59 3199.55,3906.59 3220.99,3928.02 3250.77,3928.02 3266.61,3912.17 ; 3279.23,2079.12 3288.11,2070.23 3288.11,2058.17 3327.16,2019.13 3327.16,1999.33 ; 3327.16,1999.33 3351.06,1999.33 3364.5,1985.89 3418.48,1963.54 3432.61,1969.39 ; 3425.17,4016.38 3408.87,4023.13 3402.12,4039.43 3408.87,4055.73 3420.88,4060.71 U1_9.10@3423.2,4066.31 3428.81,4063.99 3440.81,4068.96 3487.95,4182.76 3506.34,4190.38 ; 3432.61,1969.39 3424.03,1948.69 3435.43,1921.17 3443.47,1917.84 3463.43,1909.57 3471.2,1890.83 ; 3471.2,1890.83 3505.92,1806.99 ; 3505.92,1806.99 3524.32,1799.37 3638.11,1846.51 3650.12,1841.53 U1_15.10@3652.44,1835.93 3658.05,1838.25 3670.05,1833.28 3686.35,1840.03 3693.11,1856.33 3686.35,1872.63 ; 3506.34,4190.38 3590.18,4155.65 ; 3590.18,4155.65 3608.92,4147.89 3628.89,4156.16 3636.93,4159.49 3664.44,4148.09 3673.02,4127.39 ; 3673.02,4127.39 3678.87,4141.52 3732.85,4163.87 3745.86,4150.86 3769,4174 3769,4184 ; 3686.35,1872.63 3697.96,1867.82 3702.58,1856.68 3753.59,1835.55 ; 3753.59,1835.55 3780.55,1835.55 3789,1844 3789,1833 3801,1821 3859.42,1821 3870.24,1831.81 ; 3769,4184 3783,4170 3838.21,4170 3846.74,4161.47 3859.3,4161.47 ; 3859.3,4161.47 3846.83,4173.95 3846.83,4191.59 3859.3,4204.07 3872.3,4204.07 U1_8.10@3876.59,4208.36 3880.88,4204.07 3893.88,4204.07 3980.97,4291.16 4000.88,4291.16 ; 3870.24,1831.81 3870.24,1809.41 3891.3,1788.35 3921.61,1788.35 3935.95,1774 ; 3935.95,1774 4000.12,1709.84 ; 4000.12,1709.84 4020.03,1709.84 4107.12,1796.93 4120.12,1796.93 U1.10@4124.41,1792.64 4128.7,1796.93 4141.7,1796.93 4154.17,1809.41 4154.17,1827.05 4141.7,1839.53 ; 4000.88,4291.16 4065.05,4227 ; 4065.05,4227 4079.39,4212.65 4109.7,4212.65 4130.76,4191.59 4130.76,4169.19 ; 4141.7,1839.53 4154.26,1839.53 4162.79,1831 4218,1831 4232,1817 ; 4232,1817 4232,1828.99 4249.05,1846.04 4268.15,1838.13 4322.13,1860.48 4327.98,1874.61 ; 4311.65,4125.37 4304.89,4141.67 4311.65,4157.97 4327.95,4164.72 4339.95,4159.75 U1_7.10@4345.56,4162.07 4347.88,4156.47 4359.89,4151.49 4473.68,4198.63 4492.08,4191.01 ; 4327.98,1874.61 4336.56,1853.91 4364.07,1842.51 4372.11,1845.85 4392.08,1854.11 4410.82,1846.35 ; 4410.82,1846.35 4494.66,1811.62 ; 4492.08,4191.01 4526.8,4107.17 ; 4494.66,1811.62 4513.05,1819.24 4560.19,1933.04 4572.19,1938.01 U1_1.10@4577.8,1935.69 4580.12,1941.29 4592.13,1946.27 4598.88,1962.57 4592.13,1978.87 4575.83,1985.62 ; 4526.8,4107.17 4534.57,4088.43 4554.53,4080.16 4562.57,4076.83 4573.97,4049.31 4565.39,4028.61 ; 4693.08,2025.22 4734.39,2066.53 4734.39,2081.83 ; 4720.26,3923.33 4720.26,3940.97 4732.74,3953.45 4750.38,3953.45 4759.57,3944.26 U1_6.10@4765.64,3944.26 4765.64,3938.19 4774.83,3929 4898,3929 4912.08,3914.92 ; 4734.39,2081.83 4750.23,2065.98 4780.01,2065.98 4786.17,2072.14 4801.45,2087.41 4821.74,2087.41 ; 4821.74,2087.41 4912.48,2087.41 ; 4912.08,3824.18 4912.08,3803.89 4933.51,3782.46 4933.51,3752.67 4917.67,3736.83 ; 4912.08,3824.18 4912.08,3914.92 ; 4912.48,2087.41 4926.56,2101.49 4926.56,2224.66 4935.75,2233.85 U1_2.10@4941.82,2233.85 4941.82,2239.92 4951,2249.11 4951.01,2266.75 4938.53,2279.23 4920.88,2279.23 ; 4917.67,3736.83 4932.96,3736.83 4974.27,3695.52 4974.27,3674.84 4995.67,3674.84 5004.63,3665.88 ; 4920.88,2279.23 4929.77,2288.11 4941.83,2288.11 4980.87,2327.16 5000.67,2327.16 5015.11,2312.72 ; 5004.63,3665.88 4997.06,3647.58 5018.18,3596.57 5013.57,3585.43 5018.38,3573.83 ; 5015.11,2312.72 5015.11,2365.5 5037.46,2419.48 5031.61,2433.61 ; 5018.38,3573.83 5025.13,3590.13 5041.43,3596.88 5057.73,3590.13 5062.71,3578.12 U1_5.10@5068.31,3575.8 5065.99,3570.19 5070.96,3558.19 5184.76,3511.05 5192.38,3492.66 ; 5031.61,2433.61 5052.31,2425.03 5079.83,2436.43 5083.16,2444.47 5091.43,2464.43 5110.17,2472.2 ; 5110.17,2472.2 5194.01,2506.92 ; 5128.37,2687.35 5144.67,2694.11 5160.97,2687.35 5167.72,2671.05 5162.75,2659.05 U1_3.10@5165.07,2653.44 5159.47,2651.12 5154.49,2639.11 5201.63,2525.32 5194.01,2506.92 ; 5128.37,2687.35 5133.18,2698.96 5144.32,2703.58 5165.45,2754.59 ; 5129.39,3325.98 5143.52,3320.13 5170.84,3254.16 ; 5129.39,3325.98 5150.09,3334.56 5161.49,3362.07 5158.15,3370.11 5149.89,3390.08 5157.65,3408.82 ; 5157.65,3408.82 5192.38,3492.66 ; 5161.47,3141.7 5161.47,3154.26 5170,3162.79 5170,3218 5184,3232 5193,3232 ; 5161.47,3141.7 5173.95,3154.17 5191.59,3154.17 5204.07,3141.7 5204.07,3128.7 U1_4.10@5208.36,3124.41 5204.07,3120.12 5204.07,3107.12 5291.16,3020.03 5291.16,3000.12 ; 5165.45,2754.59 5169,2758.14 5169,2790 5180,2801 5180,2859.42 5169.19,2870.24 ; 5169.19,2870.24 5191.59,2870.24 5212.65,2891.3 5212.65,2921.61 5227,2935.95 ; 5170.84,3254.16 5193,3232 ; 5227,2935.95 5291.16,3000.12
  Bottom Layer w10: v1(4551,3194) 4543,3194 4548,3199 4566,3199 4566,3200 v1(4670,3304)
pads on no net: IC1.1 IC1.14 IC1.17 IC1.28 IC1.29 IC1.38 IC1.39 IC1.40 IC1.47 IC1.48 IC1.49 IC1.50 IC1.51 IC1.52 IC1.53 IC1.54 IC1.56 IC1.57 IC1.58 IC1.59 IC1.60 IC1.61 IC1.63 IC1.64 IC1.66 IC1.67 IC1.68 IC1.69 IC1.70 IC1.71 IC1.72 IC1.76 IC1.77 IC1.78 IC1.79 IC1.80 IC1.81 IC1.82 IC1.83 IC1.84 IC1.87 IC1.88 IC1.89 IC1.90 IC1.95 IC1.96 IC1.97 pk.6
copper on no net: | length 7915.8
  Bottom Layer w629.92: 5259.84,3000 ccw(c4000,3000) 5259.84,3000

## Silkscreen, mask and mechanical layers (free items; w line width, h text height)
Top Overlay:
  circle w10: c4000,3000 r1574.8